# Altium PCB ebit_ad.PcbDoc (part 5 of 6)
Units mil, origin at the board's own origin, x right, y up, seen from the top; angles counter-clockwise.
Board outline 3958.82 x 3829.88 mil, 4 copper layers (Top Layer, MidLayer1, MidLayer2, Bottom Layer); 565 components, 392 nets, 1912 pads, 1242 vias.
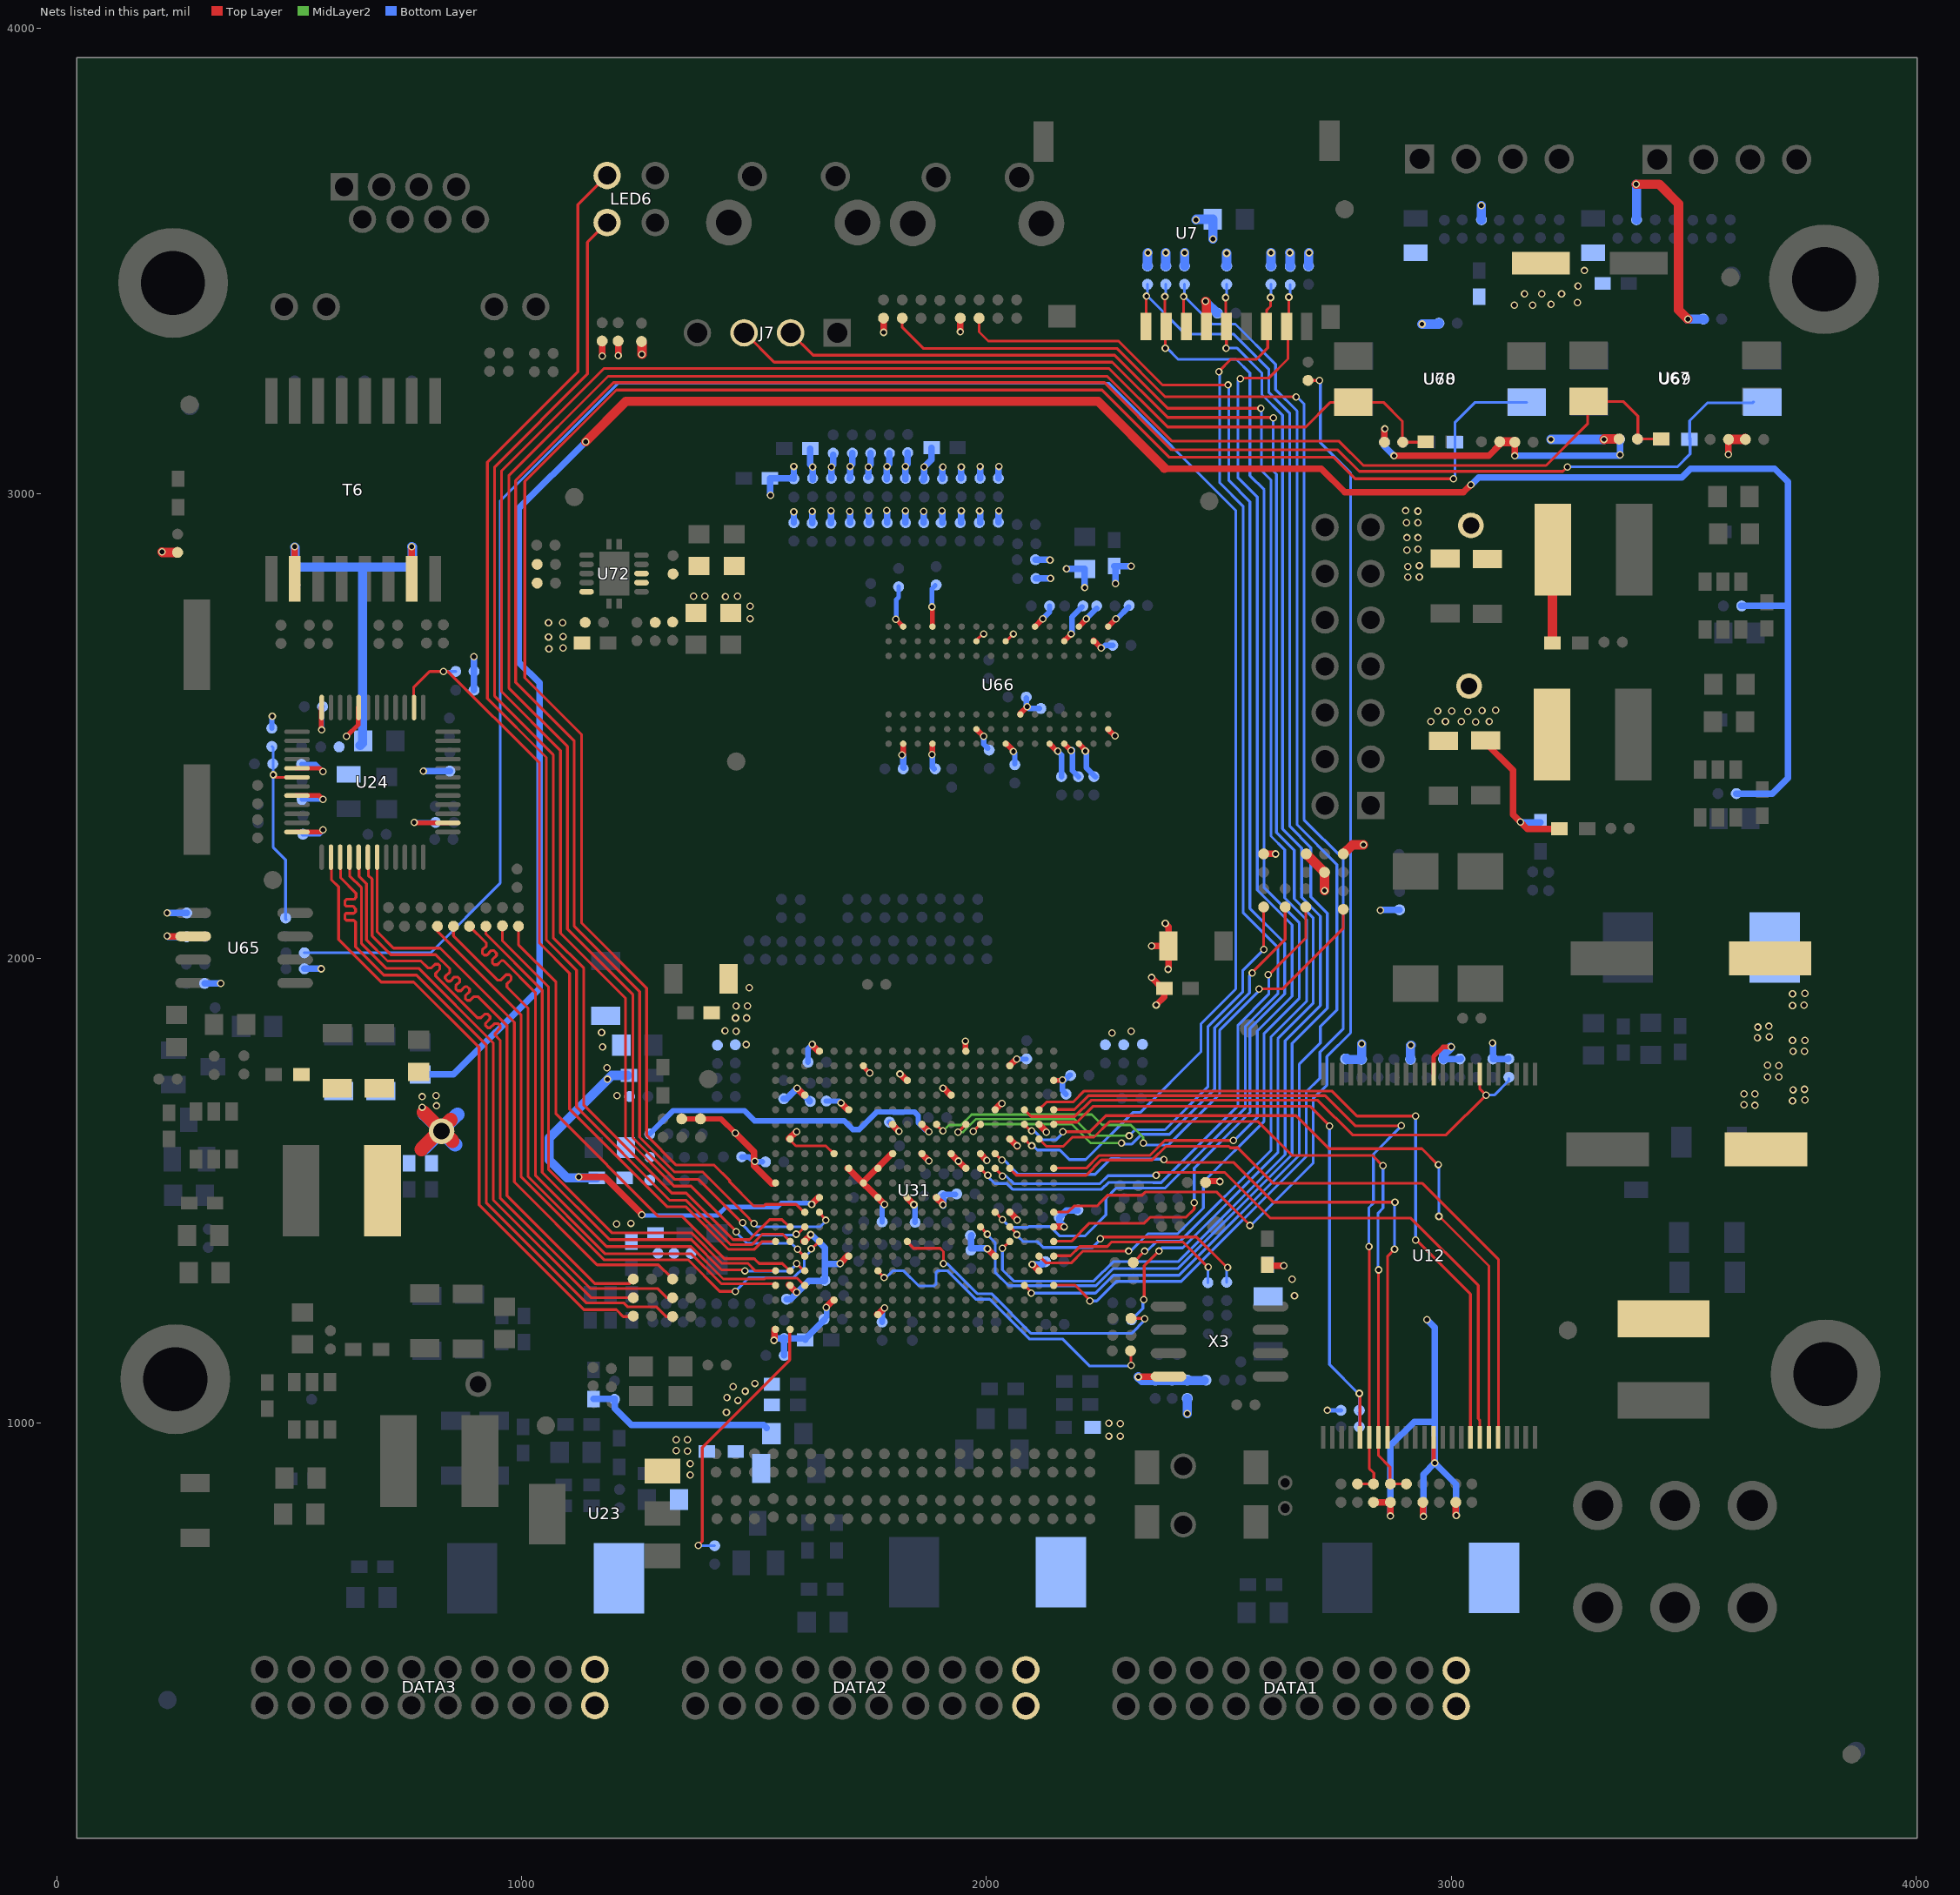
[diagram p7: the nets of this part, all layers, seen from the top]

## Via types
v1: diameter 16, hole 10, Top Layer to Bottom Layer, 1242 vias

## Nets (pads, with @x,y where several pads share a name; then routed paths per layer and width w, separated by ;. In a path a pad name is that pad's centre, name@x,y a point inside that pad or via, vN(x,y) a via of type N, cw(c..) or ccw(c..) an arc to the next point about the centre after c; other vN are vias at no path point) (continued)
REGOUT.0: C368.1 C371.1 C373.1 C375.1 L30.1 T6.2 T6.7 U24.32 | length 936.4
  Top Layer w10: v1(623.03,2477.36) 648.35,2502.68 U24.32@648.35,2539.37
  Top Layer w14: v1(511.81,2885.83) 511.95,2885.69 T6.2@511.95,2815.94 ; T6.7@763.64,2815.94 763.64,2885.69 v1(763.78,2885.83)
  Bottom Layer w20: v1@511.81,2884.84 512.8,2883.86 C375.1@512.8,2841.54 657.51,2841.54 ; C371.1@652.56,2457.68 657.51,2462.63 657.51,2841.53 ; v1(763.78,2885.83) 764.76,2884.84 764.76,2845.47 760.83,2841.54 657.51,2841.54
RESET.0_0: R2392.1 U31.C7 | length 4793.2
  Top Layer w6: U31.C7@2081.38,1611.53 2096.46,1596.46 v1@2097.44,1596.46
  Bottom Layer w6: R2392.1@532.48,2011.81 804.13,2011.81 953.74,2161.42 953.74,2983.27 1207.68,3237.2 2262.8,3237.2 2536.42,2963.58 2536.42,1934.05 2461.61,1859.25 2461.61,1799.21 2330.71,1668.31 2314.96,1668.31 2213.58,1566.93 2178.15,1566.93 2157.48,1587.6 2109.6,1587.6 2101.73,1595.47 v1@2100.39,1595.47
  other v1: 2097.54,1596.53
RESET.1_0: C376.1 R1401.1 R1995.1 U24.42 | length 437.1
  Top Layer w6: v1(465.55,2394.68) 471.01,2389.23 U24.42@515.75,2389.23
  Bottom Layer w6: R1995.1@462.6,2455.71 465.55,2452.76 465.55,2238.19 492.13,2211.61 492.13,2084.65 R1401.1@493.11,2083.66
REST.ON_0: R2469.2 U24.26 U31.Y14 | length 1775.4
  Top Layer w6: U24.26@767.54,2539.37 767.54,2582.5 802.17,2617.13 v1(831.69,2617.13) 841.54,2617.13 1038.39,2420.28 1038.39,2032.48 1103.35,1967.52 1103.35,1675.2 1312.99,1465.55 1353.35,1465.55 1445.14,1373.76 1499.12,1373.76 1499.69,1374.33 1501.3,1374.33 1517.72,1390.75 U31.Y14@1542.32,1390.75
  Bottom Layer w6: v1@835.63,2617.13 R2469.2@858.27,2617.13
RXCLK_0: R1410.1 U31.U14 | length 1410.2
  Top Layer w6: R1410.1@818.9,2068.9 818.9,2058.07 999.02,1877.95 999.02,1529.53 1177.17,1351.38 1358.27,1351.38 1426.18,1283.46 v1(1459.65,1283.46) ; v1@1624.02,1375 1638.26,1389.25 U31.U14@1638.26,1391.42
  Bottom Layer w6: v1@1459.65,1284.45 1460.63,1284.45 1489.17,1312.99 1585.27,1312.99 1608.27,1335.99 1608.27,1338.59 1608.02,1338.84 1608.02,1356.05 v1@1623.03,1371.06
  other v1: 1623.03,1375
RXD0_0: R1391.1 U31.Y16 | length 1140.1
  Top Layer w6: R1391.1@958.66,2069.88 958.66,2037.4 1058.07,1937.99 1058.07,1545.28 1193.9,1409.45 1365.16,1409.45 1430.85,1343.76 1486.94,1343.76 1502.94,1327.76 U31.Y16@1542.32,1327.76
RXD1_0: R1394.1 U31.V16 | length 1237.2
  Top Layer w6: R1394.1@923.23,2068.9 923.23,2052.17 1044.29,1931.1 1044.29,1539.37 1188.98,1394.68 1365.16,1394.68 1430.12,1329.72 1479.33,1329.72 v1@1480.32,1328.74 ; v1@1593.5,1341.54 1593.61,1341.54 U31.V16@1606.61,1328.53
  Bottom Layer w6: v1@1480.32,1328.74 1482.28,1326.77 1575.79,1326.77 v1@1589.57,1340.55
  other v1: 1480.32,1327.76 1591.54,1343.5
RXD2_0: R1397.1 U31.V17 | length 1333.3
  Top Layer w6: R1397.1@887.8,2068.9 924.21,2032.48 924.21,2026.57 915.35,2017.72 915.35,2010.83 919.29,2006.89 925.2,2006.89 935.04,2016.73 939.96,2016.73 945.87,2010.83 945.87,2005.91 937.01,1997.05 937.01,1990.16 940.95,1986.22 947.83,1986.22 956.69,1995.08 960.63,1995.08 1029.53,1926.18 1029.53,1533.46 1183.07,1379.92 1364.17,1379.92 1434.06,1310.04 1522.64,1310.04 1524.56,1311.96 1592.56,1311.96 U31.V17@1605.32,1299.21
RXD3_0: R1405.1 U31.Y17 | length 1269.5
  Top Layer w6: R1405.1@853.35,2068.9 853.35,2048.23 948.82,1952.76 954.72,1952.76 966.54,1964.57 973.43,1964.57 977.36,1960.63 977.36,1953.74 968.5,1944.88 968.5,1937.99 1013.78,1892.72 1013.78,1530.51 1180.12,1364.17 1365.16,1364.17 1429.29,1300.04 1540.36,1300.04 U31.Y17@1543.31,1297.09
RXDV_0: R1385.1 U31.W16 | length 1077.2
  Top Layer w6: R1385.1@993.11,2068.9 993.11,2029.53 1073.82,1948.82 1073.82,1665.35 1294.45,1444.72 1345.27,1444.72 1436.24,1353.76 1500.57,1353.76 1503.99,1350.34 1511.08,1343.25 1530.25,1343.25 1530.5,1343.5 1561.02,1343.5 U31.W16@1574.8,1329.72
RY/#BY_0: R1358.1 U12.7 U31.C5 | length 1197.6
  Top Layer w6: U31.C5@2081.38,1674.42 2096.35,1659.45 2189.96,1659.45 2225.08,1694.57 2712.91,1694.57 2787.4,1620.08 2989.17,1620.08 v1(3074.8,1705.71) 3061.24,1719.27 U12.7@3061.24,1750.98
  Bottom Layer w6: v1(3074.8,1705.71) 3092.52,1705.71 3124.02,1737.2 R1358.1@3124.02,1741.14
TXCLK_0: R2461.1 U24.7 | length 1302.7
  Top Layer w6: U24.7@689.07,2217.52 689.07,2057 724.41,2021.65 824.8,2021.65 984.25,1862.2 984.25,1518.7 1162.4,1340.55 1294.29,1340.55 R2461.1@1321.85,1312.99
TXD0_0: R2463.1 U24.6 | length 1360.1
  Top Layer w6: U24.6@670.19,2217.52 670.19,2178.24 678.15,2170.28 678.15,2048.23 718.5,2007.87 814.96,2007.87 845.47,1977.36 845.47,1970.47 835.63,1960.63 835.63,1956.69 841.54,1950.79 846.46,1950.79 855.32,1959.65 862.2,1959.65 867.13,1954.72 867.13,1949.8 858.27,1940.94 858.27,1934.05 862.2,1930.12 869.09,1930.12 877.95,1938.98 882.87,1938.98 887.8,1934.05 887.8,1928.15 878.94,1919.29 878.94,1913.39 882.87,1909.45 888.78,1909.45 896.65,1917.32 906.5,1917.32 968.5,1855.31 968.5,1489.17 1157.48,1300.2 1232.28,1300.2 R2463.1@1241.14,1309.05
TXD1_0: R2464.1 U24.5 | length 1458.1
  Top Layer w6: U24.5@650.32,2217.52 650.32,2176.45 666.34,2160.43 666.34,2039.37 711.61,1994.09 783.46,1994.09 798.23,1979.33 806.1,1979.33 813.98,1987.2 820.87,1987.2 823.82,1984.25 823.82,1976.38 814.96,1967.52 814.96,1961.61 904.53,1872.05 912.4,1872.05 920.28,1879.92 927.17,1879.92 932.09,1875 932.09,1870.08 925.2,1863.19 922.24,1860.24 922.24,1855.31 927.17,1850.39 932.09,1850.39 940.95,1859.25 949.8,1859.25 953.74,1855.31 953.74,1849.41 942.91,1838.58 942.91,1834.65 953.74,1823.82 953.74,1484.25 1148.62,1289.37 1293.31,1289.37 1312.99,1269.68 R2464.1@1322.83,1269.68
TXD2_0: R2465.1 U24.4 | length 1275.9
  Top Layer w6: U24.4@629.92,2198.82 629.92,2177.17 655.51,2151.57 655.51,2031.5 708.66,1978.35 778.54,1978.35 938.98,1817.91 938.98,1480.31 1149.61,1269.68 R2465.1@1240.16,1269.68
TXD3_0: R2466.1 U24.3 | length 1489.5
  Top Layer w6: U24.3@610.59,2217.52 610.59,2172.87 643.7,2139.76 643.7,2130.91 639.76,2126.97 623.03,2126.97 620.08,2124.02 620.08,2114.17 622.05,2112.2 636.81,2112.2 642.72,2106.3 642.72,2100.39 638.78,2096.46 622.05,2096.46 620.08,2094.49 620.08,2084.65 623.03,2081.69 638.78,2081.69 642.72,2077.76 642.72,2024.61 703.74,1963.58 773.62,1963.58 924.21,1812.99 924.21,1473.42 1138.78,1258.86 1219.49,1258.86 1228.35,1250 1290.35,1250 1311.02,1229.33 R2466.1@1321.85,1229.33
TXEN_0: R2462.1 U24.2 | length 1350.8
  Top Layer w6: U24.2@590.73,2217.52 590.73,2169.11 606.3,2153.54 606.3,2040.35 697.83,1948.82 767.72,1948.82 908.46,1808.07 908.46,1469.49 1133.86,1244.09 1203.74,1244.09 1218.5,1229.33 R2462.1@1239.17,1229.33
U3.A14_0: R2650.1 U31.A14 | length 2849.1
  Top Layer w6: R2650.1@1984.25,3376.97 1984.25,3347.44 2003.94,3327.76 2284.45,3327.76 2378.94,3233.27 v1(2519.69,3233.27) ; U31.A14@2144.69,1391.42 2182.76,1391.42 2221.46,1430.12 2339.57,1430.12 2352.36,1442.91 2429.13,1442.91 2446.85,1460.63 v1(2446.85,1474.41)
  Bottom Layer w6: v1@2446.85,1472.44 2446.85,1548.23 2567.09,1668.46 2567.09,1682.29 2566.93,1682.45 2566.93,1848.42 2641.73,1923.23 2641.73,2032.48 2566.93,2107.28 2566.93,2982.28 2521.65,3027.56 2521.65,3231.3 v1(2519.69,3233.27)
U3.A17_0: R2646.1 U31.A17 | length 3319.7
  Top Layer w6: R2646.1@1818.9,3376.97 1818.9,3357.28 1864.17,3312.01 2280.51,3312.01 2384.84,3207.68 v1(2666.34,3207.68) ; U31.A17@2144.69,1297.09 2190.12,1297.09 v1@2222.44,1264.76
  Bottom Layer w6: v1@2227.36,1262.8 2237.2,1262.8 2279.53,1305.12 2419.29,1305.12 2687.99,1573.82 2687.99,1712.6 2717.52,1742.13 2717.52,1798.23 2767.72,1848.42 2767.72,2213.58 2683.07,2298.23 2683.07,3192.91 2668.31,3207.68 v1(2666.34,3207.68)
  other v1: 2222.44,1262.8
U3.A.9_0: R160.1 U7.8 U31.A9 | length 2429.1
  Top Layer w6: U31.A9@2144.69,1548.64 2214.98,1548.64 2242.28,1575.94 2351.54,1575.94 2383.86,1608.27 v1(2531.5,1608.27) ; v1@2547.24,3248.03 2607.28,3248.03 2648.62,3289.37 2648.62,3356.42 U7.8@2645.79,3359.25 2650.59,3364.05 v1(2650.59,3422.24)
  Bottom Layer w6: v1@2532.48,1607.28 2582.68,1657.48 2582.68,1843.5 2657.48,1918.31 2657.48,2071.85 2582.68,2146.65 2582.68,2992.13 2541.34,3033.46 v1@2541.34,3242.13 ; v1@2651.58,3421.26 2653.54,3423.23 R160.1@2653.54,3448.82
  other v1: 2546.26,3247.05
U3.A.12_0: R167.1 U31.A12 | length 2444.9
  Top Layer w6: 2164.94,1454.31 2144.69,1454.31 2175.58,1454.31 2188.42,1467.14 2237.81,1467.14 2246.06,1475.39 2260.83,1490.16 2334.65,1490.16 2341.54,1497.05 2496.06,1497.05 2566.93,1426.18 v1(2566.93,1425.2) ; R167.1@2691.93,3243.11 v1(2716.54,3243.11)
  Bottom Layer w6: v1(2566.93,1425.2) 2568.9,1425.2 2702.76,1559.05 2702.76,1697.83 2732.28,1727.36 2732.28,1788.39 2783.46,1839.57 2783.46,3044.29 2718.5,3109.25 v1@2718.5,3237.2
U3.A.16_0: J7.2 R2436.2 | length 3140.3
  Top Layer w6: J7.2@1578.74,3345.47 1626.97,3297.24 2275.59,3297.24 2389.76,3183.07 v1(2590.55,3183.07) ; R2436.2@2315.95,1345.47 v1(2340.55,1370.08)
  Bottom Layer w6: v1(2340.55,1370.08) 2345.47,1370.08 2367.13,1391.73 2417.32,1391.73 2612.2,1586.61 2612.2,1830.71 2688.98,1907.48 2688.98,2082.68 2641.73,2129.92 2641.73,2233.27 2612.2,2262.79 2612.2,3028.54 2591.54,3049.21 2591.54,3178.15 v1@2592.52,3179.13
U3.B.15_0: R164.1 U7.2 U31.B15 | length 2673.7
  Top Layer w6: U31.B15@2113.03,1359.98 2128.52,1344.49 2182.09,1344.49 2207.52,1369.92 2305.95,1369.92 v1(2306.1,1370.08) ; v1(2383.86,3423.23) 2383.86,3362.08 U7.2@2386.69,3359.25 2384.84,3357.41 v1(2384.84,3312.01)
  Bottom Layer w6: v1(2306.1,1370.08) 2310.04,1370.08 2347.44,1407.48 2411.42,1407.48 2466.54,1462.6 2466.54,1518.7 2597.44,1649.61 2597.44,1838.58 2673.23,1914.37 2673.23,2075.79 2597.44,2151.57 2597.44,3007.87 2566.93,3038.39 2566.93,3258.86 2537.4,3288.39 2412.4,3288.39 v1@2388.78,3312.01 ; v1@2385.83,3424.21 R164.1@2385.83,3449.8
U3.C.17_0: R163.1 U7.3 U31.C17 | length 2857.2
  Top Layer w6: U31.C17@2081.38,1297.09 2097.96,1280.51 v1@2098.43,1280.51 ; v1(2424.21,3423.23) 2424.21,3364.91 U7.3@2429.87,3359.25
  Bottom Layer w6: v1@2097.44,1278.54 2098.68,1279.78 2173.95,1279.78 2174.2,1279.53 2234.25,1279.53 2272.64,1317.91 2414.37,1317.91 2673.23,1576.77 2673.23,1772.64 2718.5,1817.91 2718.5,1853.35 2753.94,1888.78 2753.94,2201.77 2668.31,2287.4 2668.31,3177.17 2622.05,3223.42 2622.05,3277.56 2535.43,3364.17 2485.24,3364.17 v1@2429.13,3420.28 ; v1@2426.18,3423.23 R163.1@2426.18,3449.8
  other v1: 2096.46,1279.53
U3.D.14_0: R162.1 U7.5 U31.D14 | length 2798.6
  Top Layer w6: v1(2034.45,1375.98) 2034.45,1376.14 U31.D14@2049.73,1391.42 ; v1(2514.76,3421.26) 2514.76,3360.73 U7.5@2516.24,3359.25 2516.24,3312.5 v1(2515.75,3312.01)
  Bottom Layer w6: v1(2034.45,1375.98) 2034.45,1329.72 2058.64,1305.54 2230.73,1305.54 2272.64,1347.44 2412.4,1347.44 2642.72,1577.76 2642.72,1822.83 2718.5,1898.62 2718.5,2090.55 2678.15,2130.91 2678.15,2237.2 2636.81,2278.54 2636.81,3168.31 2592.52,3212.6 2592.52,3258.86 2538.39,3312.99 v1@2517.72,3312.99 ; v1@2516.73,3422.24 R162.1@2516.73,3449.8
U3.E.12_0: R161.1 U7.7 U31.E12 | length 2632.1
  Top Layer w6: U31.E12@2018.08,1454.31 v1(2034.45,1437.99) v1(2034.45,1437.99) ; v1(2500,3261.81) 2500,3262.79 2525.59,3288.39 2580.71,3288.39 2605.32,3312.99 2605.32,3356.54 U7.7@2602.61,3359.25 2602.61,3393.95 2611.22,3402.56 v1(2611.22,3421.26)
  Bottom Layer w6: v1@2034.45,1435.04 v1(2034.45,1437.99) 2051.43,1421.01 2071.38,1421.01 2089.05,1421.01 2091.02,1422.98 2137.06,1422.98 2157.48,1402.56 2211.61,1402.56 2256.89,1447.83 2256.89,1483.27 2279.53,1505.91 2384.84,1505.91 2557.09,1678.15 2556.93,1678.31 2556.93,1853.19 2626.97,1923.23 2626.97,2023.62 2552.17,2098.42 2552.17,2972.44 2501.97,3022.64 v1@2501.97,3261.81 ; v1@2612.2,3422.24 R161.1@2612.2,3449.8
U3.F13_0: R165.1 U7.1 U31.F13 | length 3075.9
  Top Layer w6: U31.F13@1986.43,1422.87 2001.97,1407.33 v1(2001.97,1406.5) ; U7.1@2343.5,3359.25 2343.5,3423.23 v1(2344.49,3424.21)
  Bottom Layer w6: v1@2000.98,1406.5 2018.7,1388.78 2018.7,1324.8 2047.97,1295.54 2235.5,1295.54 2272.64,1332.68 2412.4,1332.68 2657.48,1577.76 2657.48,1816.93 2733.27,1892.72 2733.27,2096.46 2697.83,2131.89 2697.83,2238.19 2652.56,2283.46 2652.56,3172.24 2607.28,3217.52 2607.28,3267.72 2532.48,3342.52 2428.15,3342.52 v1@2346.46,3424.21 ; v1@2343.5,3421.26 v1@2346.46,3424.21 ; v1(2344.49,3424.21) v1@2346.46,3424.21 ; R165.1@2346.46,3449.8 v1@2346.46,3424.21
U3.F.15_0: J7.3 R2437.1 | length 3378.2
  Top Layer w6: J7.3@1478.35,3345.47 1480.32,3345.47 1543.31,3282.48 2270.67,3282.48 2389.76,3163.39 2616.14,3163.39 v1(2617.13,3162.4) ; v1@2335.63,1265.75 2339.57,1269.68 2339.57,1338.58 v1(2371.06,1370.08) v1@2371.06,1371.06
  Bottom Layer w6: R2437.1@2312.01,1222.44 2336.61,1247.05 v1@2336.61,1266.73 ; v1(2371.06,1370.08) 2377.95,1376.97 2422.24,1376.97 2626.97,1581.69 2626.97,1826.77 2702.76,1902.56 2702.76,2087.6 2662.4,2127.95 2662.4,2232.28 2624.02,2270.67 2624.02,3041.34 2617.13,3048.23 v1@2617.13,3160.43
  other v1: 2338.58,1265.75
U3.U12_0: R2554.1 U31.U12 U69.2 | length 4971.6
  Top Layer w6: v1@1502.3,1426.83 1489.17,1439.96 1489.17,1440.94 1389.76,1540.35 1328.74,1540.35 1253.94,1615.16 1253.94,1928.15 1113.19,2068.9 1113.19,2467.52 987.2,2593.5 987.2,3027.56 1197.83,3238.19 2253.94,3238.19 2398.62,3093.5 2755.91,3093.5 2802.17,3047.24 2998.04,3047.24 2998.29,3047.5 3011.55,3047.5 3011.8,3047.24 3240.16,3047.24 v1(3250,3057.09) ; U31.U12@1638.26,1454.31 v1@1654.58,1437.99
  Bottom Layer w6: v1@1502.3,1426.83 1506.89,1422.24 1641.73,1422.24 1654.09,1434.6 v1(1654.09,1436.56) ; v1(3250,3057.09) 3486.22,3057.09 3513.78,3084.65 R2554.1@3513.78,3119.09 ; R2554.1@3512.8,3116.14 3512.8,3156.5 3551.18,3194.88 3648.62,3194.88 U69.2@3650.59,3196.85
  other v1: 1500,1429.13
U3.V12_0: R2557.1 U31.V12 U70.2 | length 4380.3
  Top Layer w6: U31.V12@1606.61,1454.31 1590.45,1470.47 1524.6,1470.47 1521.39,1467.27 1499.28,1467.27 1447.58,1518.96 1447.58,1521.91 1414.37,1555.12 1332.68,1555.12 1268.7,1619.09 1268.7,1936.02 1128.94,2075.79 1128.94,2481.3 1006.89,2603.35 1006.89,3025.59 1203.74,3222.44 2249.02,3222.44 2393.7,3077.76 2747.05,3077.76 2793.31,3031.5 v1(3004.92,3031.5)
  Bottom Layer w6: v1@3003.94,3030.51 3007.87,3034.45 3007.87,3152.56 3051.18,3195.87 U70.2@3162.4,3195.87
U3.V13_0: R2546.2 R2552.1 U31.V13 U67.4 | length 4775.4
  Top Layer w6: v1@1475.39,1430.12 1474.41,1430.12 1379.92,1524.61 1328.74,1524.61 1239.17,1614.17 1239.17,1922.24 1098.43,2062.99 1098.43,2455.71 972.44,2581.69 972.44,3038.39 1186.02,3251.97 2259.84,3251.97 2399.61,3112.2 2758.86,3112.2 2811.02,3060.04 3203.74,3060.04 3293.31,3149.61 U67.4@3293.31,3184.05 ; v1@1593.5,1406.5 1606.61,1419.6 U31.V13@1606.61,1422.87 ; U67.4@3295.28,3197.83 3370.08,3197.83 3401.58,3166.34 R2546.2@3401.58,3116.14 ; R2546.2@3400.59,3117.13 3447.83,3117.13 R2552.1@3448.82,3116.14
  Bottom Layer w6: v1@1474.41,1430.12 1474.41,1427.16 1497.05,1404.53 1588.58,1404.53 v1@1589.57,1403.54
  other v1: 1590.55,1406.5 1475.39,1431.1
U3.V15_0: R2548.2 R2553.1 U31.V15 U68.4 | length 4249.4
  Top Layer w6: v1@1464.57,1409.45 1364.17,1509.84 1327.76,1509.84 1223.43,1614.17 1223.43,1914.37 1083.66,2054.13 1083.66,2446.85 956.69,2573.82 956.69,3048.23 1177.17,3268.7 2263.78,3268.7 2389.76,3142.72 2687.01,3142.72 2740.16,3195.87 U68.4@2789.37,3195.87 2854.33,3195.87 2894.69,3155.51 R2548.2@2894.69,3111.22 ; v1(1593.5,1374.02) 1593.5,1373.09 U31.V15@1606.61,1359.98 ; R2548.2@2895.67,3110.24 R2553.1@2945.87,3110.24
  Bottom Layer w6: v1@1464.57,1409.45 1464.57,1407.48 1485.24,1386.81 1580.71,1386.81 v1(1593.5,1374.02)
  other v1: 1461.61,1411.42
U3.W13_0: LED6.4 U31.W13 | length 2661.9
  Top Layer w6: LED6.4@1184.06,3582.68 1141.73,3540.35 1141.73,3256.89 941.93,3057.09 941.93,2563.98 1067.91,2437.99 1067.91,2044.29 1133.86,1978.35 1133.86,1684.05 1322.83,1495.08 1354.33,1495.08 1454.72,1394.68 1490.16,1394.68 1533.46,1437.99 1560.04,1437.99 U31.W13@1573.82,1424.21
U3.W14_0: LED6.3 U31.W14 | length 2785.8
  Top Layer w6: LED6.3@1184.06,3684.05 1121.06,3621.06 1121.06,3261.81 926.18,3066.93 926.18,2559.05 1053.15,2432.09 1053.15,2039.37 1118.11,1974.41 1118.11,1680.12 1318.9,1479.33 1354.33,1479.33 1449.91,1383.76 1494.98,1383.76 1517.72,1406.5 1562.01,1406.5 U31.W14@1575.79,1392.72
U12-IO0_0: R2577.1 R2584.1 U12.29 U31.A6 | length 1397.1
  Top Layer w6: U31.A6@2144.69,1642.98 2149.35,1647.64 2194.88,1647.64 2228.66,1681.42 2696.54,1681.42 2738.19,1639.76 v1(2738.19,1638.78) ; v1(2802.17,1063.98) 2803.66,1062.48 U12.29@2803.66,969.49
  Bottom Layer w6: v1@2736.22,1643.7 2738.19,1641.73 2738.19,1125.98 2800.2,1063.98 v1(2802.17,1063.98) 2802.17,1031.5 R2577.1@2804.13,1029.53 ; R2577.1@2801.18,1022.64 2802.17,1021.65 R2584.1@2802.17,992.13
U12-IO1_0: R2581.2 R2588.2 U12.30 U31.A5 | length 1620.2
  Top Layer w6: U31.A5@2144.69,1674.42 2189.18,1674.42 2219.33,1704.57 2728.5,1704.57 2793.31,1639.76 v1(2892.72,1639.76) ; R2588.2@2798.23,869.09 R2581.2@2830.71,869.09 ; v1(2822.83,1379.92) 2823.48,1379.28 U12.30@2823.48,969.49 2823.48,902.9 2833.66,892.72 R2581.2@2833.66,871.06
  Bottom Layer w6: v1(2822.83,1379.92) 2822.83,1463.58 2832.68,1473.42 2832.68,1578.74 2890.75,1636.81 v1@2892.72,1636.81
U12-IO2_0: R2578.2 R2585.2 U12.31 U31.B7 | length 1538
  Top Layer w6: U31.B7@2113.03,1611.53 2113.03,1611.38 2128.94,1595.47 2165.35,1595.47 2185.04,1615.16 2231.3,1615.16 2264.76,1648.62 2584.65,1648.62 2657.48,1575.79 2830.71,1575.79 2852.36,1554.13 v1(2853.35,1554.13) ; v1(2843.5,1329.72) 2843.29,1329.51 U12.31@2843.29,969.49 2843.29,930.33 2868.11,905.51 R2578.2@2868.11,875 ; R2578.2@2869.09,869.09 2896.65,869.09 R2585.2@2897.64,868.11
  Bottom Layer w6: v1@2842.52,1322.83 2842.52,1451.77 2853.35,1462.6 v1(2853.35,1554.13)
U12-IO3_0: U12.32 U31.E8 | length 1435.5
  Top Layer w6: U31.E8@2018.08,1580.09 v1@2034.19,1563.98 ; v1(2381.89,1566.93) 2387.8,1561.02 2531.5,1561.02 2617.13,1475.39 v1(2878.94,1475.39) ; U12.32@2863.1,969.49 2863.1,1359.17 v1(2877.95,1374.02)
  Bottom Layer w6: v1@2039.37,1563.98 2039.73,1563.98 2053.31,1550.4 2053.31,1550.04 2068.23,1535.12 2233.94,1535.12 2267.72,1568.9 2286.42,1568.9 ; 2287.4,1567.91 v1@2380.91,1567.91 ; v1(2877.95,1374.02) v1@2877.95,1474.41
  other v1: 2033.46,1565.94
U12-IO4_0: U12.41 U31.B5 | length 1590.7
  Top Layer w6: U31.B5@2113.03,1674.42 2129.56,1690.94 2187.01,1690.94 2210.63,1714.57 2743.11,1714.57 2797.24,1660.43 v1(2923.23,1660.43) ; v1(2923.23,1393.7) 2925.2,1393.7 3041.42,1277.47 U12.41@3041.42,969.49
  Bottom Layer w6: v1@2922.24,1660.43 2923.23,1659.45 v1(2923.23,1393.7)
U12-IO5_0: U12.42 U31.E9 | length 1489.8
  Top Layer w6: U31.E9@2018.08,1548.64 2033.26,1533.46 v1@2034.45,1533.46 ; v1@2365.16,1535.43 2368.94,1539.21 2512.95,1539.21 2611.22,1440.94 2913.39,1440.94 3058.07,1296.26 3058.07,1009.84 3061.24,1006.68 U12.42@3061.24,969.49
  Bottom Layer w6: v1(2034.45,1531.5) 2042.32,1531.5 2058.7,1515.12 2244.45,1515.12 2261.81,1532.48 2360.24,1532.48 v1@2363.19,1535.43
  other v1: 2365.16,1533.46
U12-IO6_0: U12.43 U31.C6 | length 1606
  Top Layer w6: U31.C6@2081.38,1642.98 2097.39,1626.97 2097.44,1626.97 v1(2097.44,1628.53) ; v1(2164.37,1626.97) 2222.44,1626.97 2256.89,1661.42 2666.34,1661.42 2737.2,1590.55 2937.01,1590.55 2971.46,1556.1 v1(2972.44,1556.1) ; v1(2973.43,1444.88) 2974.41,1444.88 3081.05,1338.24 U12.43@3081.05,969.49
  Bottom Layer w6: v1(2097.44,1628.53) 2097.44,1626.97 2104.33,1626.97 2121.89,1609.41 2149.76,1609.41 2164.37,1624.02 v1@2164.37,1625.98 ; v1@2970.47,1555.12 2973.43,1552.17 v1(2973.43,1444.88)
U12-IO7_0: U12.44 U31.D9 | length 1554
  Top Layer w6: U31.D9@2049.73,1548.64 2049.73,1547.71 2063.98,1533.46 2214.57,1533.46 2247.05,1565.94 2356.3,1565.94 2385.83,1595.47 2521.66,1595.47 2524.87,1592.27 2538.12,1592.27 2539.36,1593.5 2617.13,1515.75 2937.99,1515.75 3101.38,1352.36 U12.44@3101.38,984.25
U31-A15_0: R2438.2 U31.A15 | length 394.4
  Top Layer w6: U31.A15@2144.69,1359.98 2180.84,1359.98 2200.79,1379.92 2259.84,1379.92 2269.69,1389.76 2422.24,1389.76 2476.38,1335.63 v1(2477.36,1335.63)
  Bottom Layer w6: R2438.2@2476.38,1302.16 2476.38,1327.76 v1@2477.36,1328.74
U31-D13_0: R2439.2 U31.D13 | length 556.2
  Top Layer w6: U31.D13@2049.73,1422.87 2066.93,1405.67 v1@2066.93,1405.51 ; v1@2241.14,1395.67 2246.06,1400.59 2451.77,1400.59 2517.72,1334.65 v1(2518.7,1334.65)
  Bottom Layer w6: v1@2066.93,1404.53 2066.93,1402.56 2078.74,1390.75 2109.25,1390.75 2122.05,1377.95 2228.35,1377.95 v1@2244.09,1393.7 ; R2439.2@2516.73,1303.15 2516.73,1330.71 v1@2517.72,1331.69
  other v1: 2245.08,1396.65 2064.96,1405.51
U31-L14_0: R2609.2 U31.L14 | length 652.7
  Top Layer w6: U31.L14@1828.17,1391.42 1843.61,1375.98 1900.59,1375.98 1907.48,1369.09 v1(1907.48,1343.5) v1@1908.46,1342.52 ; R2609.2@2311.02,1225.39 2339.57,1225.39 v1(2340.55,1224.41)
  Bottom Layer w6: v1@1908.46,1342.52 1916.34,1342.52 1980.32,1278.54 2010.83,1278.54 2096.46,1192.91 2312.01,1192.91 v1@2341.54,1222.44
U31-N16_0: R2608.2 U31.N16 | length 714.5
  Top Layer w6: U31.N16@1764.87,1328.53 1781.5,1311.91 v1@1781.5,1311.02 ; R2608.2@2310.04,1155.51 2311.02,1154.53 v1(2311.02,1124.02)
  Bottom Layer w6: v1@1781.5,1311.02 1798.23,1327.76 1821.85,1327.76 1854.27,1295.34 1887.86,1295.34 1891.73,1299.21 1891.73,1324.8 1894.69,1327.76 1916.34,1327.76 1977.36,1266.73 2006.89,1266.73 2092.52,1181.1 2163.39,1181.1 2221.46,1123.03 v1@2306.1,1123.03
  other v1: 1779.53,1312.99
U31-TCK_0: R37.1 U31.F9 | length 1134.7
  Top Layer w6: U31.F9@1986.43,1548.64 2001.97,1533.1 v1@2001.97,1531.5 ; v1(2606.3,1964.57) 2608.27,1964.57 2687.01,2043.31 R37.1@2687.01,2110.24
  Bottom Layer w6: v1@2001.97,1531.5 2017.97,1515.5 2043.56,1515.5 2056.1,1502.95 2248.03,1502.95 2262.8,1517.72 2358.28,1517.72 2358.53,1517.46 2375.73,1517.46 2541.34,1683.07 2541.34,1856.3 2607.28,1922.24 v1@2607.28,1960.63
  other v1: 2002.95,1533.46
U31-TDI_0: R1506.1 U31.G6 | length 1067.7
  Top Layer w6: v1(1938.98,1625.98) 1954.78,1641.78 U31.G6@1954.78,1642.98 ; v1(2596.46,2018.7) R1506.1@2596.46,2110.24
  MidLayer2 w5: v1(1938.98,1625.98) 1949.72,1625.98 1977.84,1654.1 2189.4,1654.1 2224.82,1618.68 2306.52,1618.68 v1(2307.09,1618.11)
  Bottom Layer w6: v1(2307.09,1618.11) 2320.04,1631.06 2384.02,1631.06 2476.38,1723.42 2476.38,1852.36 2551.18,1927.17 2551.18,1973.42 v1(2596.46,2018.7)
U31-TDO_0: R1505.1 U31.F6 | length 1074.5
  Top Layer w6: v1(1971.46,1627.95) 1986.43,1642.92 U31.F6@1986.43,1642.98 ; v1(2571.85,1968.5) 2571.85,1969.49 2642.72,2040.35 R1505.1@2642.72,2110.24
  MidLayer2 w5: v1(1971.46,1627.95) 1971.46,1629.02 1985.71,1643.28 2183.5,1643.28 2224.41,1602.36 v1(2290.35,1602.36)
  Bottom Layer w6: v1@2287.4,1598.42 2288.39,1597.44 2293.31,1602.36 2295.28,1600.39 2312.99,1600.39 2333.66,1621.06 2393.7,1621.06 2491.14,1718.5 2491.14,1850.39 2565.95,1925.2 2565.95,1962.6 v1(2571.85,1968.5)
U31-TMS_0: R1504.1 U31.J6 | length 1248.4
  Top Layer w6: U31.J6@1891.47,1642.98 v1@1908.46,1625.98 ; v1(2586.61,1934.05) 2636.81,1934.05 2767.72,2064.96 R1504.1@2767.72,2105.31
  MidLayer2 w5: v1(1906.5,1628.94) 1907.41,1628.94 1919.78,1641.31 1945.37,1641.31 1968,1663.94 2226.79,1663.94 2249.42,1641.31 2310.43,1641.31 2337,1614.74 v1@2337,1601.95
  Bottom Layer w6: v1@2337.6,1598.42 2391.73,1598.42 2501.97,1708.66 2501.97,1845.47 2586.61,1930.12 v1(2586.61,1934.05)
  other v1: 2337.6,1602.36
U31.W20_0: R1481.2 U31.W20 | length 579.3
  Top Layer w6: v1(1379.92,737.2) 1388.78,746.06 1388.78,947.83 1576.77,1135.83 1576.77,1200.94 U31.W20@1574.96,1202.76
  Bottom Layer w6: v1@1383.86,736.22 R1481.2@1415.35,736.22
VCC: C93.2 C94.2 C147.1 C289.2 C290.2 C367.1 C369.1 C370.1 C374.1 C379A.2 C665.1 C666.2 C667.1 C668.2 C669.2 C670.1 C671.2 C672.2 C673.1 C674.2 C845.2 C846.2 C1887.1 C2343.2 C2394.1 C2398.1 FB15.1 FB16.2 L7.1 L113.1 R36.2 R38.2 R45.1 R46.1 R47.1 R160.2 R161.2 R162.2 R163.2 R164.2 R165.2 R166.2 R245.1 R247.1 R1279.1 R1333.1 R1344.2 R1358.2 R1359.2 R1360.2 R1361.2 R1379.1 R1408.1 R1500.2 R1502.2 R1503.2 R1507.2 R1948.1 R1950.1 R1995.2 R2336.2 R2391.1 R2430.2 R2432.2 R2460.2 R2469.1 R2470.1 R2539.1 R2546.1 R2548.1 R2551.1 R2577.2 R2578.1 R2579.2 R2580.2 R2581.1 R2582.2 R2583.2 R2602.1 R2617.1 R2619.1 R2641A.1 R2647.1 R3555.1 TP1.1 U7.4 U12.12 U12.37 U23.3 U24.14 U24.36 U24.41 U24.44 U24.48 U31.A13 U31.B6 U31.B16 U31.D7 U31.D12 U31.E15 U31.M6 U31.T8 U31.U11 U31.W7 U31.Y10 U65.2 U72.10 | length 5969.8
  Top Layer w6: U31.W7@1574.96,1611.53 1590.04,1596.46 1654.53,1596.46 U31.T8@1670.28,1580.71
  Top Layer w10: U24.48@515.75,2271.65 567.91,2271.65 v1(572.83,2276.57) ; U24.44@515.75,2350.04 564.33,2350.04 v1(572.83,2341.53) ; U24.41@515.75,2408.82 565.59,2408.82 v1(572.83,2401.57) ; U24.36@568.9,2539.37 568.9,2492.13 v1(569.88,2491.14) ; v1(768.7,2292.32) 769.77,2291.25 U24.14@840.55,2291.25 ; U12.37@2962.17,969.49 2962.17,916.77 v1(2964.57,914.37) ; U12.12@2962.17,1750.98 2962.17,1788.94 2982.28,1809.05 v1(3000,1809.05)
  Top Layer w12: R1500.2@1344.49,1654.53 1429.13,1654.53 v1(1459.65,1624.02)
  Top Layer w14: v1(237.2,2048.23) 238.19,2047.24 U65.2@293.31,2047.24 ; v1(1123.03,1529.53) 1179.13,1529.53 1258.86,1449.8 v1(1258.86,1447.83) ; v1(1173.23,3295.28) R45.1@1173.23,3327.76 ; v1(1207.68,3296.26) R46.1@1207.68,3327.76 ; v1(1459.65,1624.02) 1500,1583.66 1500,1554.13 1538.39,1515.75 U31.Y10@1545.28,1515.75 ; U31.W7@1574.96,1611.53 1590.4,1626.97 v1(1591.54,1626.97) ; v1@1625,1470.47 1625,1472.49 U31.U11@1638.26,1485.75 ; v1(1778.54,3346.46) R2647.1@1778.54,3376.97 ; U31.M6@1796.52,1642.98 1811.54,1627.95 v1(1812.01,1627.95) ; v1(1943.9,3347.44) R2641A.1@1943.9,3376.97 ; v1@2002.95,1374.02 2016.99,1359.98 U31.E15@2018.08,1359.98 ; U31.D12@2049.73,1454.31 2065.95,1438.1 v1@2065.95,1437.99 ; U31.D7@2049.73,1611.53 2065.79,1595.47 v1@2065.95,1595.47 ; v1@2098.43,1342.52 2112.41,1328.53 U31.B16@2113.03,1328.53 ; U31.B6@2113.03,1642.98 2127.95,1628.06 v1@2127.95,1627.95 ; U31.A13@2144.69,1422.87 2166.96,1422.87 2167.32,1423.23 2167.43,1423.12 v1(2167.43,1422.31) ; R2430.2@2471.46,1520.67 2500.98,1520.67 v1(2501.97,1519.68) ; R36.2@2596.46,2224.41 v1(2622.05,2224.41) ; C670.1@2604.33,1340.55 2606.3,1338.58 v1(2639.76,1338.58) ; R2581.1@2832.68,829.72 R2578.1@2871.06,829.72 ; R2548.1@2856.3,3110.24 2856.3,3137.79 v1(2857.28,3138.78) ; v1(2869.09,800.2) R2578.1@2869.09,829.72 ; R247.1@2938.98,829.72 2938.98,800.2 v1(2939.96,799.21) ; R245.1@3009.84,829.72 3009.84,802.16 v1(3010.83,801.18) ; C289.2@3068.9,2468.5 3132.87,2404.53 3132.87,2309.05 v1(3148.62,2293.31) 3163.39,2278.54 R1333.1@3232.28,2278.54
  Top Layer w20: v1(226.38,2874.02) 227.36,2873.03 R47.1@259.84,2873.03 ; v1(1258.86,3299.21) R1379.1@1258.86,3324.8 ; v1(2471.46,3413.39) 2473.06,3411.79 U7.4@2473.06,3359.25 ; R1507.2@2687.99,2224.41 R2602.1@2727.36,2185.04 v1(2727.36,2145.67) ; R38.2@2767.72,2224.41 2787.4,2244.09 v1(2811.02,2244.09) ; v1(3328.74,3116.14) 3329.72,3117.13 R2546.1@3361.22,3117.13 ; v1(3397.64,3665.35) 3446.85,3665.35 3489.17,3623.03 3489.17,3394.68 v1(3508.86,3375)
  Bottom Layer w10: C369.1@526.57,2417.32 557.09,2417.32 v1(572.83,2401.57) ; C370.1@527.56,2341.54 573.82,2341.54 v1@574.8,2342.52 ; C374.1@529.53,2266.73 564.96,2266.73 v1@570.87,2272.64 ; v1(569.88,2491.14) 569.88,2539.37 C367.1@571.85,2541.34 ; v1(768.7,2292.32) C379A.2@813.98,2292.32 ; v1@1257.87,1446.85 1421.26,1446.85 1439.21,1464.8 1550.43,1464.8 1559.06,1473.42 1620.08,1473.42 v1@1625,1468.5 ; v1(2733.27,1027.56) R2577.2@2762.8,1027.56
  Bottom Layer w12: R1995.2@462.6,2495.08 462.6,2519.68 v1(463.58,2520.67) ; C667.1@1473.43,1572.83 1489.17,1572.83 1500,1562.01 C668.2@1517.72,1562.01 ; R1502.2@1791.34,1647.64 1792.32,1647.64 v1(1812.01,1627.95)
  Bottom Layer w14: v1(237.2,2048.23) 239.17,2046.26 C1887.1@279.53,2046.26 ; v1(237.2,2097.44) R2336.2@279.53,2097.44 ; R1948.1@317.91,1945.87 v1(352.36,1945.87) ; R1950.1@532.48,1977.36 v1(568.9,1977.36) ; v1(788.39,2402.56) R1408.1@845.47,2402.56 ; R2470.1@897.64,2576.77 v1(897.64,2648.62) ; R2539.1@1967.52,1404.53 1966.54,1403.54 1966.54,1375.98 1999.02,1375.98 2000.98,1374.02 v1(2002.07,1375.07) ; v1(2098.42,1341.53) 2120.08,1341.54 C674.2@2125,1346.46 ; v1(2167.43,1422.31) 2167.43,1423.12 2156.5,1434.05 2156.5,1441.93 2172.24,1457.68 C671.2@2195.87,1457.68 ; v1(2847.44,2103.35) 2848.43,2104.33 R2391.1@2888.78,2104.33 ; v1(2869.09,800.2) 2869.09,951.77 2920.28,1002.95 2960.63,1002.95 ; v1(2939.96,799.21) 2939.96,889.76 v1(2964.57,914.37) 2964.57,1205.71 v1(2947.83,1222.44) ; v1@2966.54,912.4 3010.83,868.11 v1(3010.83,801.18) ; R2582.2@2983.27,1783.46 3019.69,1783.46 R1359.2@3020.67,1784.45 ; v1(3088.58,1817.91) 3089.57,1816.93 R2583.2@3089.57,1783.46 3122.05,1783.46 R1358.2@3123.03,1784.45 ; v1(3148.62,2293.31) 3149.61,2292.32 L113.1@3191.93,2292.32
  Bottom Layer w20: R2460.2@1161.42,1527.56 1097.44,1527.56 1059.06,1565.94 1059.06,1613.19 1193.9,1748.03 C666.2@1227.36,1748.03 ; R165.2@2346.46,3489.17 2346.46,3516.73 v1(2347.44,3517.72) ; R164.2@2385.83,3489.17 v1(2385.83,3517.72) ; R163.2@2426.18,3489.17 v1(2426.18,3517.72) ; v1(2432.09,1020.67) R1279.1@2432.09,1053.15 ; v1(2450.79,3588.58) 2451.77,3589.57 C93.2@2487.2,3589.57 v1(2487.2,3547.24) ; v1@2472.44,3411.42 2496.06,3387.79 C94.2@2497.05,3387.79 ; R162.2@2516.73,3489.17 v1(2516.73,3516.73) ; R161.2@2612.2,3489.17 v1(2612.2,3517.72) ; v1(2652.56,3517.72) 2653.54,3516.73 R160.2@2653.54,3488.19 ; R166.2@2692.91,3489.17 2692.91,3516.73 v1(2693.9,3517.72) ; R1360.2@2774.61,1784.45 2776.58,1782.48 R2579.2@2807.09,1782.48 v1(2807.09,1815.94) ; R2580.2@2912.4,1782.48 2912.4,1812.01 v1(2913.39,1812.99) ; v1(2937.01,3364.17) 2971.46,3364.17 R3555.1@2973.43,3366.14 ; R2582.2@2983.27,1783.46 2983.27,1793.31 v1@2998.03,1808.07 ; R1361.2@3064.96,3588.58 v1(3064.96,3619.09) ; v1(3214.57,3116.14) v1(3328.74,3116.14) ; v1(3397.64,3665.35) 3398.62,3664.37 R1344.2@3398.62,3588.58 ; v1(3508.86,3375) 3543.31,3375 R2551.1@3544.29,3374.02
  other v1: 1362.84,888.55 1362.84,913.15 1356.94,939.72 1332.34,940.7 1332.34,964.32 1356.94,964.32 2263.2,972.19 2287.8,972.19 2287.8,998.76 2263.2,999.74 2662.7,1274.28 2657.78,1309.7 2065.94,1437.01 1624.02,1470.47 1501.97,1562.99 2066.05,1596.53 2128.94,1625.73 1205.4,1704.29 1184.74,1739.71 1183.75,1764.31 1173.91,1809.58 1171.94,1840.08 3052.37,2508.22 2955.94,2509.2 2987.42,2509.2 3021.86,2509.2 3081.89,2509.2 3035.64,2530.85 2970.7,2531.83 3001.2,2531.83 3066.14,2532.82 3095.66,2533.8 1058.78,2665.66 1089.29,2667.62 1057.8,2691.24 1089.29,2692.22 1057.8,2721.74 1088.3,2721.74
VCC1: C2395.1 C2401.1 C2402.2 C2403.1 C2404.1 C2405.1 C2406.1 C2407.1 C2408.1 C2409.1 R2618.1 R2621.2 R2622.2 R2623.2 R2624.2 R2625.2 R2626.2 R2627.2 R2628.2 R2629.2 R2630.2 R2631.2 R2632.2 R2633.2 R2634.2 R2635.2 R2636.2 R2637.2 R2638.2 R2639.2 R2640.2 R2641.2 R2642.2 R2643.2 R2644.2 U72.3 | length 949.7
  Bottom Layer w14: v1(1535.43,2996.06) 1534.45,2997.05 C2404.1@1534.45,3032.48 1584.65,3032.48 R2629.2@1585.63,3031.5 v1(1585.63,3058.07) ; R2627.2@1585.63,2937.01 v1(1585.63,2960.63) ; C2403.1@1621.06,3096.46 1621.06,3062.01 v1(1625.98,3057.09) R2635.2@1625.98,3029.53 ; R2632.2@1625,2936.02 v1(1625,2961.61) ; R2637.2@1665.35,2936.02 v1(1665.35,2962.6) ; R2625.2@1666.34,3032.48 v1(1666.34,3057.09) 1670.28,3061.02 C2406.1@1670.28,3082.68 ; v1(1705.71,2961.61) 1706.69,2960.63 R2633.2@1706.69,2937.01 ; R2622.2@1705.71,3032.48 1706.69,3033.46 v1(1706.69,3058.07) 1711.61,3062.99 C2407.1@1711.61,3086.61 ; R2644.2@1745.08,3035.43 1746.06,3036.42 v1(1746.06,3057.09) 1750.98,3062.01 C2405.1@1750.98,3086.61 ; v1(1746.06,2962.6) 1747.05,2961.61 R2631.2@1747.05,2937.01 ; v1(1785.43,2963.58) 1786.42,2962.6 R2630.2@1786.42,2937.01 ; R2634.2@1785.43,3030.51 1785.43,3057.09 v1(1786.42,3058.07) 1791.34,3062.99 C2408.1@1791.34,3086.61 ; R2626.2@1825.79,2937.01 v1(1825.79,2962.6) ; R2628.2@1825.79,3030.51 v1(1825.79,3058.07) 1830.71,3062.99 C2409.1@1830.71,3087.6 ; R2623.2@1864.17,3028.54 1866.14,3030.51 v1(1866.14,3057.09) 1881.89,3072.83 C2402.2@1881.89,3098.42 ; R2624.2@1865.16,2937.01 v1(1865.16,2961.61) ; v1(1904.53,2962.6) 1905.51,2961.61 R2621.2@1905.51,2937.01 ; R2636.2@1905.51,3031.5 1905.51,3056.1 v1(1906.5,3057.09) ; R2638.2@1945.87,2937.01 v1@1945.87,2962.6 ; R2643.2@1945.87,3032.48 v1@1945.87,3057.09 ; v1(1985.24,2962.6) 1986.22,2961.61 R2642.2@1986.22,2937.01 ; R2641.2@1986.22,3032.48 v1(1986.22,3058.07) ; R2640.2@2025.59,2937.99 2025.59,2961.61 v1(2026.57,2962.6) ; R2639.2@2025.59,3032.48 2025.59,3057.09 v1(2026.57,3058.07)
  other v1: 1945.87,2962.6 1945.87,3057.09
VCC6: C68.1 C538.1 R1279.2 R2440.2 X3.8 | length 210.4
  Top Layer w14: v1(2326.77,1099.41) 2327.76,1100.39 X3.8@2391.73,1100.39
  Bottom Layer w20: v1(2326.77,1099.41) 2334.65,1091.54 R2440.2@2468.5,1091.54
VCC8: C661.1 C662.2 D24.1 EC2.1 EC5.1 EC6.1 L9.2 L11.2 L37.2 R2350.1 R2544.2 R2545.1 R2547.1 R2549.2 R2556.1 | length 673.7
  Top Layer w14: v1(2876.97,3080.71) 3080.71,3080.71 3104.33,3104.33 R2549.2@3104.33,3111.22 ; v1(3136.81,3080.71) R2547.1@3136.81,3110.24 ; v1(3596.46,3083.66) R2544.2@3596.46,3116.14
  Top Layer w20: R2549.2@3104.33,3111.22 R2547.1@3137.8,3111.22 ; R2544.2@3596.46,3116.14 3629.92,3116.14 R2545.1@3631.89,3118.11
  Bottom Layer w14: R2556.1@2856.3,3110.24 2856.3,3101.38 v1@2875.98,3081.69 ; v1(3136.81,3080.71) 3362.2,3080.71 3363.19,3081.69 R2350.1@3363.19,3116.14
  other v1: 3653.59,1683.62 3629.98,1684.61 3734.28,1693.46 3760.85,1695.43 3629.98,1708.22 3653.59,1708.22 3735.26,1717.08 3759.86,1718.06 3680.16,1744.63 3704.76,1744.63 3704.76,1769.23 3680.16,1770.22 3735.26,1799.74 3759.86,1799.74 3734.28,1823.35 3760.85,1823.35 3658.51,1829.26 3684.1,1831.22 3659.5,1851.89 3683.11,1853.86 3734.28,1898.14 3758.88,1899.12 3734.28,1923.72 3760.85,1924.7 3363.31,3082.87 3136.01,3404.64 3175.37,3404.64 3214.73,3406.61 3271.8,3410.54 3157.66,3429.24 3195.05,3429.24 3237.36,3429.24 3272.78,3445.97 3286.56,3479.42
VCC-DATA1: D21.1 DATA1.1 DATA1.2
VCC-DATA2: D22.1 DATA2.1 DATA2.2
VCC-DATA3: D23.1 DATA3.1 DATA3.2
VCC-DDR: C390.2 C392.2 C1985.2 C2250.2 C2269.1 C2280.1 C2288.2 C2291.2 C2292.1 C2293.1 C2294.1 C2295.2 C2296.1 C2297.2 C2298.1 C2299.2 C2300.1 C2303.2 C2367.1 C2368.1 C2369.1 C2370.1 C2371.1 C2372.1 C2373.2 C2374.1 C2375.1 C2376.1 C2377.2 C2378.1 C2379.1 C2381.2 C2382.1 C2383.1 C2396.2 C2397.2 C2399.1 L32.1 R1417.1 R2159.2 R2457.1 R2458.2 R2537.2 R2615.2 TP2.1 U31.A3 U31.D2 U31.E5 U31.G1 U31.H4 U31.L3 U31.P2 U31.R5 U31.U1 U31.V4 U66.A1 U66.A8 U66.B2 U66.C1 U66.C9 U66.D2 U66.D9 U66.E9 U66.F1 U66.G7 U66.H2 U66.H9 U66.K2 U66.K8 U66.N1 U66.N9 U66.R1 U66.R9 U72.2 | length 2110.6
  Top Layer w6: U66.K2@1978.35,2684.05 1992.13,2697.83 v1@1995.08,2697.83 ; U66.H2@2041.34,2684.05 2044.29,2684.05 v1(2058.07,2697.83)
  Top Layer w10: U31.P2@1733,1769 v1@1748.8,1753.2 ; v1@1804.13,2729.33 v1(1805.12,2729.33) U66.R1@1820.87,2713.58 ; v1(1882.87,2755.91) 1883.86,2754.92 1883.86,2736.35 U66.N1@1883.86,2713.58 ; U31.A3@2144.69,1737.31 2162.51,1737.31 v1(2163.39,1738.19)
  Top Layer w12: v1(1818,2437.13) 1820.75,2437.13 1820.87,2437.01 U66.R9@1820.87,2461.61 ; v1(1882.97,2438.11) 1883.74,2438.11 1883.86,2437.99 U66.N9@1883.86,2461.61 ; v1@1954.72,1821.85 1954.78,1821.8 U31.G1@1954.78,1800.2 ; U66.K8@1978.35,2492.13 1979.33,2492.13 v1(1994.09,2477.36) ; U66.H9@2041.34,2461.61 2043.31,2461.61 v1@2058.07,2446.85 ; U66.G7@2072.84,2524.61 2072.84,2526.57 v1(2087.6,2541.34) ; U66.F1@2104.33,2713.58 v1(2121.06,2730.31) ; U66.E9@2135.83,2461.61 v1@2151.58,2445.87 ; U66.D9@2167.32,2461.61 v1@2182.09,2446.85 ; U66.D2@2167.32,2684.05 2169.29,2684.05 v1@2183.07,2697.83 ; U66.C9@2198.82,2461.61 2214.57,2445.87 v1@2215.55,2445.87 ; U66.C1@2198.82,2713.58 2214.57,2729.33 v1(2214.57,2730.31) ; U66.B2@2230.32,2684.05 2245.08,2669.29 v1@2245.08,2667.32 ; U66.A8@2261.81,2492.13 2275.59,2478.35 v1(2276.57,2478.35) ; U66.A1@2261.81,2713.58 v1(2278.54,2730.31)
  Top Layer w14: v1(1592.52,1720.47) 1606.61,1706.38 U31.V4@1606.61,1705.86 ; v1(1625,1814.96) 1625,1813.46 U31.U1@1638.26,1800.2 ; v1(1687.01,1688.98) U31.R5@1701.57,1674.42 ; v1(1749.02,1752.95) v1@1750,1752.95 ; v1(1813.98,1750.98) 1814.5,1750.98 U31.L3@1828.17,1737.31 ; v1@1909.45,1719.49 1923.07,1705.86 U31.H4@1923.13,1705.86 ; U31.E5@2018.08,1674.42 2031.65,1687.99 v1(2033.46,1687.99) ; U31.D2@2049.73,1768.75 2064.44,1783.46 v1(2064.96,1783.46) ; v1(2355.31,1958.66) 2378.94,1935.04 C2269.1@2382.87,1935.04 2382.87,1917.32 v1(2365.16,1899.61) ; v1(2355.31,2026.57) C2294.1@2391.73,2026.57 ; v1(2384.84,2074.8) 2391.73,2067.91 C2294.1@2391.73,2026.57 ; v1(2390.75,1976.38) 2391.73,1977.36 C2294.1@2391.73,2026.57
  Top Layer w20: R1417.1@3217.52,2678.15 3217.52,2806.1 L32.1@3219.49,2808.07
  Bottom Layer w10: v1@1806.1,2729.33 1806.1,2771.65 1811.02,2776.57 C2382.1@1811.02,2799.21 ; v1(1882.87,2755.91) 1882.87,2795.28 C2376.1@1889.76,2802.17 ; v1(2064.96,1783.46) C2293.1@2085.63,1783.46
  Bottom Layer w12: C2299.2@1616.14,1776.57 1616.14,1805.12 v1@1626.97,1815.94 ; C2298.1@1655.51,1692.91 1683.07,1692.91 v1(1687.01,1688.98) ; v1(1882.97,2438.11) 1883.74,2438.11 1883.86,2437.99 1883.86,2411.42 C2375.1@1887.8,2407.48 ; v1(1994.09,2477.36) 1994.09,2460.63 C2368.1@2002.95,2451.77 ; v1(2058.07,2444.88) 2061.02,2441.93 C2378.1@2061.02,2418.31 ; C2300.1@2085.63,2560.04 2085.63,2543.31 v1(2087.6,2541.34) 2091.54,2537.4 C2250.2@2114.17,2537.4 ; v1@2118.11,2727.36 2135.83,2745.08 C2369.1@2135.83,2757.87 ; v1@2150.59,2447.83 2161.42,2437.01 C2372.1@2161.42,2390.75 ; R2457.1@2171.26,1707.68 2163.39,1715.55 2163.39,1733.27 2179.13,1749.02 C2291.2@2180.12,1749.02 ; v1@2184.06,2697.83 2184.06,2734.25 C2371.1@2205.71,2755.91 ; v1@2185.04,2448.82 2185.04,2403.54 C2367.1@2197.83,2390.75 ; v1@2214.57,2446.85 2214.57,2410.43 C2379.1@2234.25,2390.75 ; v1(2214.57,2730.31) C2381.2@2237.2,2752.95 ; v1@2250,2668.31 2254.92,2673.23 C2373.2@2271.65,2673.23 ; v1(2278.54,2730.31) 2280.51,2730.31 C2377.2@2306.1,2755.91
  Bottom Layer w14: C2296.1@1563.98,1697.83 1569.88,1697.83 v1(1592.52,1720.47) 1620.08,1692.91 C2280.1@1620.08,1691.93 ; v1(1818,2437.13) 1820.75,2437.13 1820.87,2437.01 1820.87,2411.42 C2374.1@1821.85,2410.43 ; C2383.1@2105.32,2857.28 2135.83,2857.28 v1(2136.81,2856.3) ; R2537.2@2106.3,2816.93 v1(2137.79,2816.93) ; v1(2172.24,2837.6) C2370.1@2211.61,2837.6 v1(2211.61,2797.24) ; v1(2277.56,2806.1) 2277.56,2840.55 C2292.1@2274.61,2843.5 v1(2311.02,2843.5)
  other v1: 1906.5,1720.47 1482.89,1814.5 1954.72,1821.85 2270.09,1839.1 1461.24,1843.03 2311.42,1843.03 1437.62,1844.02 1460.26,1871.57 1483.87,1871.57 1461.24,1897.15 1485.84,1897.15 1489.78,1936.51 2153.54,2445.87 2212.6,2445.87 2182.09,2446.85 2247.05,2667.32 1994.09,2697.83 2182.09,2697.83 1491.74,2730.6 1491.74,2757.17 1438.61,2777.83 1369.73,2778.82 1394.33,2778.82 1464.19,2778.82 2906.74,2820.14 2931.34,2820.14 2906.74,2842.78 2931.34,2844.74 2904.77,2878.2 2928.38,2880.17 2904.77,2904.77 2928.38,2904.77 2903.78,2937.24 2928.38,2937.24 2928.38,2961.84 2901.82,2962.82
VCCA: C82.2 C397.1 C399.1 C2337.1 C2338.1 C2339.1 C2340.2 C2341.2 C2342.1 C2344.1 C2351.1 C2352.1 C2353.2 C2354.1 C2355.1 C2356.2 FB10.2 L33.2 R1420.2 R1493.2 R2603.2 R2604.2 TP3.1 U31.F8 U31.G9 U31.H8 U31.J11 U31.K8 U31.L11 U31.M8 U31.N9 U31.N11 U31.P10 U31.R9 | length 5998.5
  Top Layer w14: U31.R9@1701.57,1548.64 1702.34,1548.64 v1(1780.51,1470.47) v1@1780.51,1469.49 ; U31.P10@1735.24,1518.7 1735.24,1518.8 U31.M8@1796.52,1580.09 ; U31.L11@1828.17,1485.75 1828.22,1485.75 v1@1844.49,1469.49 ; U31.K8@1859.82,1580.09 1875.93,1563.98 v1(1875.98,1563.98) ; U31.J11@1891.47,1485.75 1906.76,1470.47 v1@1907.48,1470.47 ; U31.H8@1923.13,1580.09 1954.57,1548.64 U31.G9@1954.78,1548.64 ; U31.F8@1986.43,1580.09 v1(2000.98,1564.96) ; 2382.87,3054.13 2383.86,3053.15 2720.47,3053.15 2770.67,3002.95 3026.58,3002.95 v1(3042.32,3018.7)
  Top Layer w20: v1(1137.8,3111.22) 1224.41,3197.83 2240.16,3197.83 2382.87,3055.12 2382.87,3054.13
  Top Layer w30: 784.25,1589.16 847.22,1652.14 ; 789.17,1668.86 851.16,1606.87
  Bottom Layer w12: C2339.1@1775.59,1433.07 1775.59,1464.57 v1@1780.51,1469.49 ; v1@1844.49,1469.49 1846.46,1467.52 C2342.1@1846.46,1432.09 ; C2354.1@1905.51,1489.17 1908.46,1492.13 R1493.2@1933.07,1492.13
  Bottom Layer w14: C82.2@796.26,1750 853.35,1750 1038.39,1935.04 1038.39,2592.52 994.09,2636.81 994.09,2967.52 v1(1137.8,3111.22) ; C2354.1@1904.53,1485.24 1907.48,1482.28 v1@1907.48,1467.52 ; v1@3044.29,3019.68 3059.06,3034.45 3496.06,3034.45 3514.76,3053.15 3695.87,3053.15 3724.41,3024.61 3724.41,2759.98 ; R2603.2@3613.19,2354.33 3690.95,2354.33 3724.41,2387.79 3724.41,2759.98 ; R2604.2@3623.03,2757.87 3722.31,2757.87 3724.41,2759.98
  Bottom Layer w30: 791.14,1593.1 861.98,1663.94 ; 791.14,1664.93 857.06,1599
  other v1: 1204.42,1428.77 1234.92,1429.75 1906.5,1469.49 1843.89,1470.09 1939.55,1563.66 786.22,1679.69 816.72,1682.64 786.22,1702.32 815.74,1704.29
VCCB: C663.1 R1494.2 R1495.2 R1496.2 R2460.1 U31.K6 | length 694.1
  Top Layer w14: U31.K6@1859.82,1642.98 1875.83,1626.97 v1(1875.98,1626.97)
  Bottom Layer w12: R1496.2@1275.59,1622.05 1325.79,1672.24 1479.33,1672.24 1500.98,1650.59 1693.9,1650.59 1712.6,1631.89 1726.38,1631.89 1763.94,1669.45 1800.37,1669.45 1800.53,1669.29 1821.52,1669.29 1821.67,1669.45 1845.32,1669.45 1853.19,1661.57 1853.19,1646.81 v1@1869.09,1630.91
VCCE: C363.2 C2305.2 C2306.2 C2307.1 C2308.2 C2309.2 C2310.1 C2312.2 C2313.1 C2314.1 C2365.2 FB16.1 L29.2 R2540.2 U31.N19 U31.R15 U31.T18 U31.V14 U31.W17 U31.Y20 | length 1010.2
  Top Layer w14: v1@1544,1178.38 U31.Y20@1544,1202 ; U31.W17@1574.96,1297.09 1590.55,1281.5 v1(1591.54,1281.5) ; U31.V14@1606.61,1391.42 1607.96,1391.42 v1@1623.03,1406.5 ; v1@1656.5,1250.98 1669.91,1264.4 U31.T18@1669.91,1265.65 ; v1@1687.01,1344.49 1687.01,1345.42 U31.R15@1701.57,1359.98 ; U31.N19@1764.87,1234.2 1766.68,1234.2 v1(1780.51,1248.03)
  Bottom Layer w12: C2308.2@1650.59,1223.42 1656.5,1229.33 v1@1656.5,1247.05
  Bottom Layer w14: L29.2@1154.53,1052.16 1200.79,1052.16 1200.79,1031.5 1236.22,996.06 1520.67,996.06 C2365.2@1527.56,989.17 ; v1@1544.29,1181.1 1545.28,1182.09 C2307.1@1564.96,1182.09 C2309.2@1609.25,1182.09 ; C2307.1@1563.98,1184.05 1564.96,1183.07 C2310.1@1564.96,1145.67 ; C2313.1@1569.88,1266.73 1578.74,1266.73 1618.11,1306.1 R2540.2@1651.58,1306.1 ; C2309.2@1610.24,1179.13 1610.24,1181.1 C2308.2@1651.57,1222.44 ; v1@1623.03,1406.5 1652.56,1376.97 1652.56,1345.54 ; R2540.2@1652.56,1307.09 1652.56,1345.54 ; v1@1685.04,1342.52 1655.58,1342.52 1652.56,1345.54 ; C2314.1@1775.59,1217.52 1775.59,1243.11 v1(1780.51,1248.03)
  other v1: 1440.58,1023.36 1465.18,1048.94 1441.56,1054.85 1480.92,1068.62 1455.34,1078.46 1501.58,1085.35 1543.31,1178.15 1655.51,1249.02 1685.04,1343.5 1622.05,1405.51